# Altium PCB USBAudioAmp.PcbDoc
Units mil, origin at the board's own origin, x right, y up, seen from the top; angles counter-clockwise.
Board outline 3000 x 4000 mil, 4 copper layers (Top Layer, POWER, GROUND, Bottom Layer); 140 components, 93 nets, 395 pads, 244 vias.
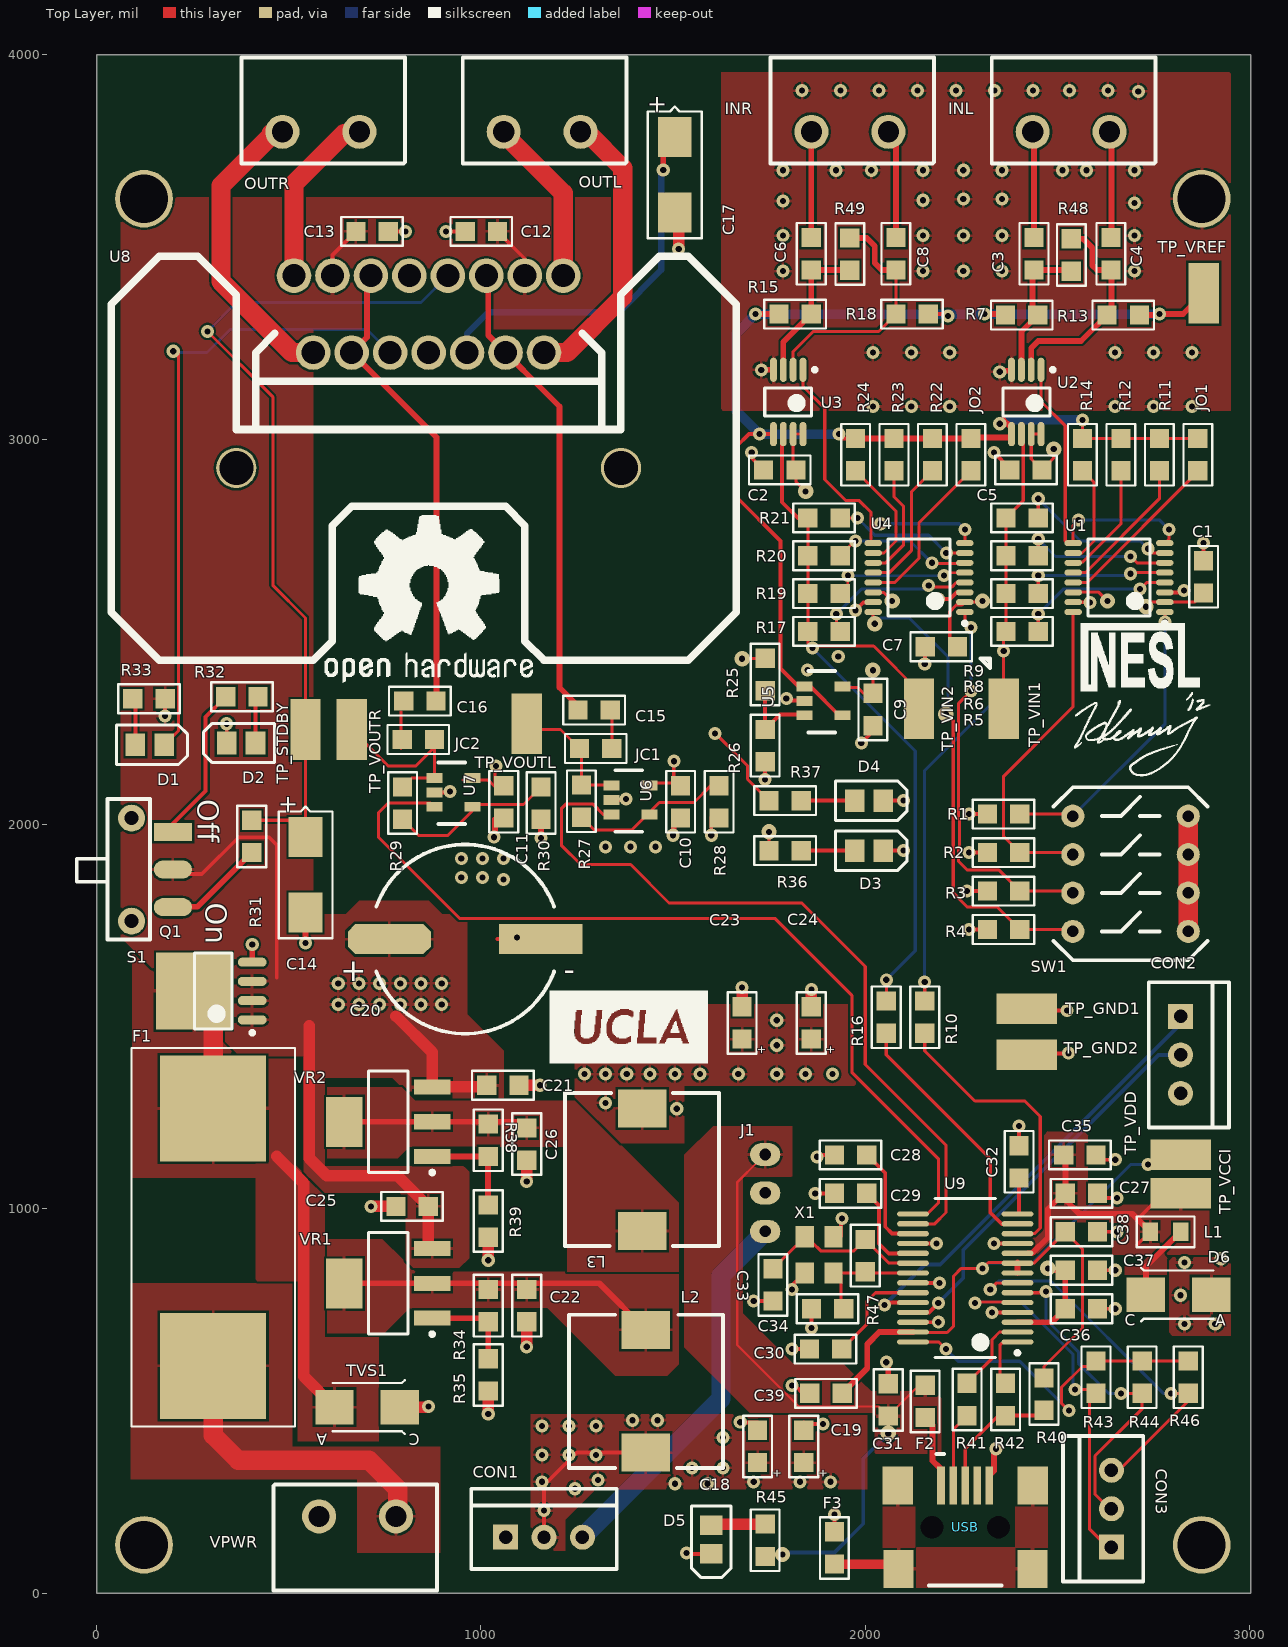
[diagram p0: Top Layer view]
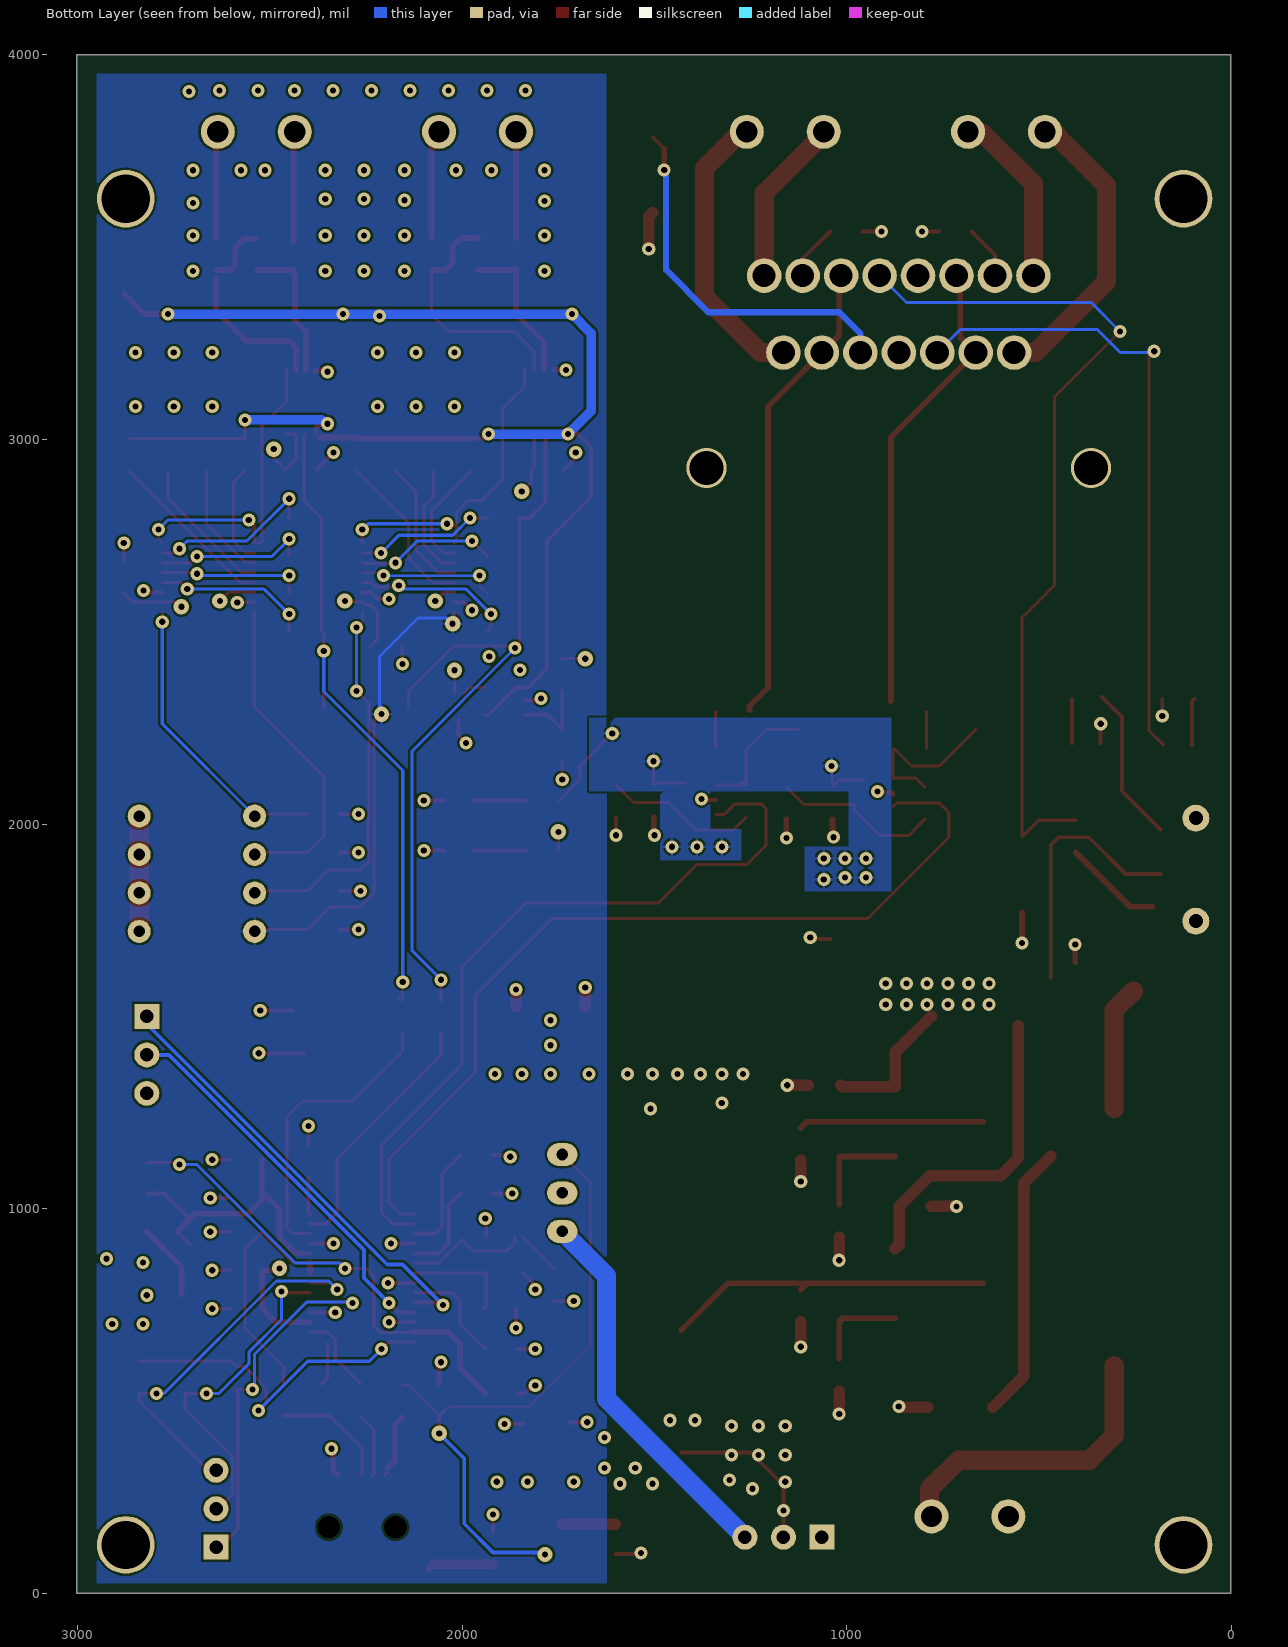
[diagram p1: Bottom Layer view, seen from below]
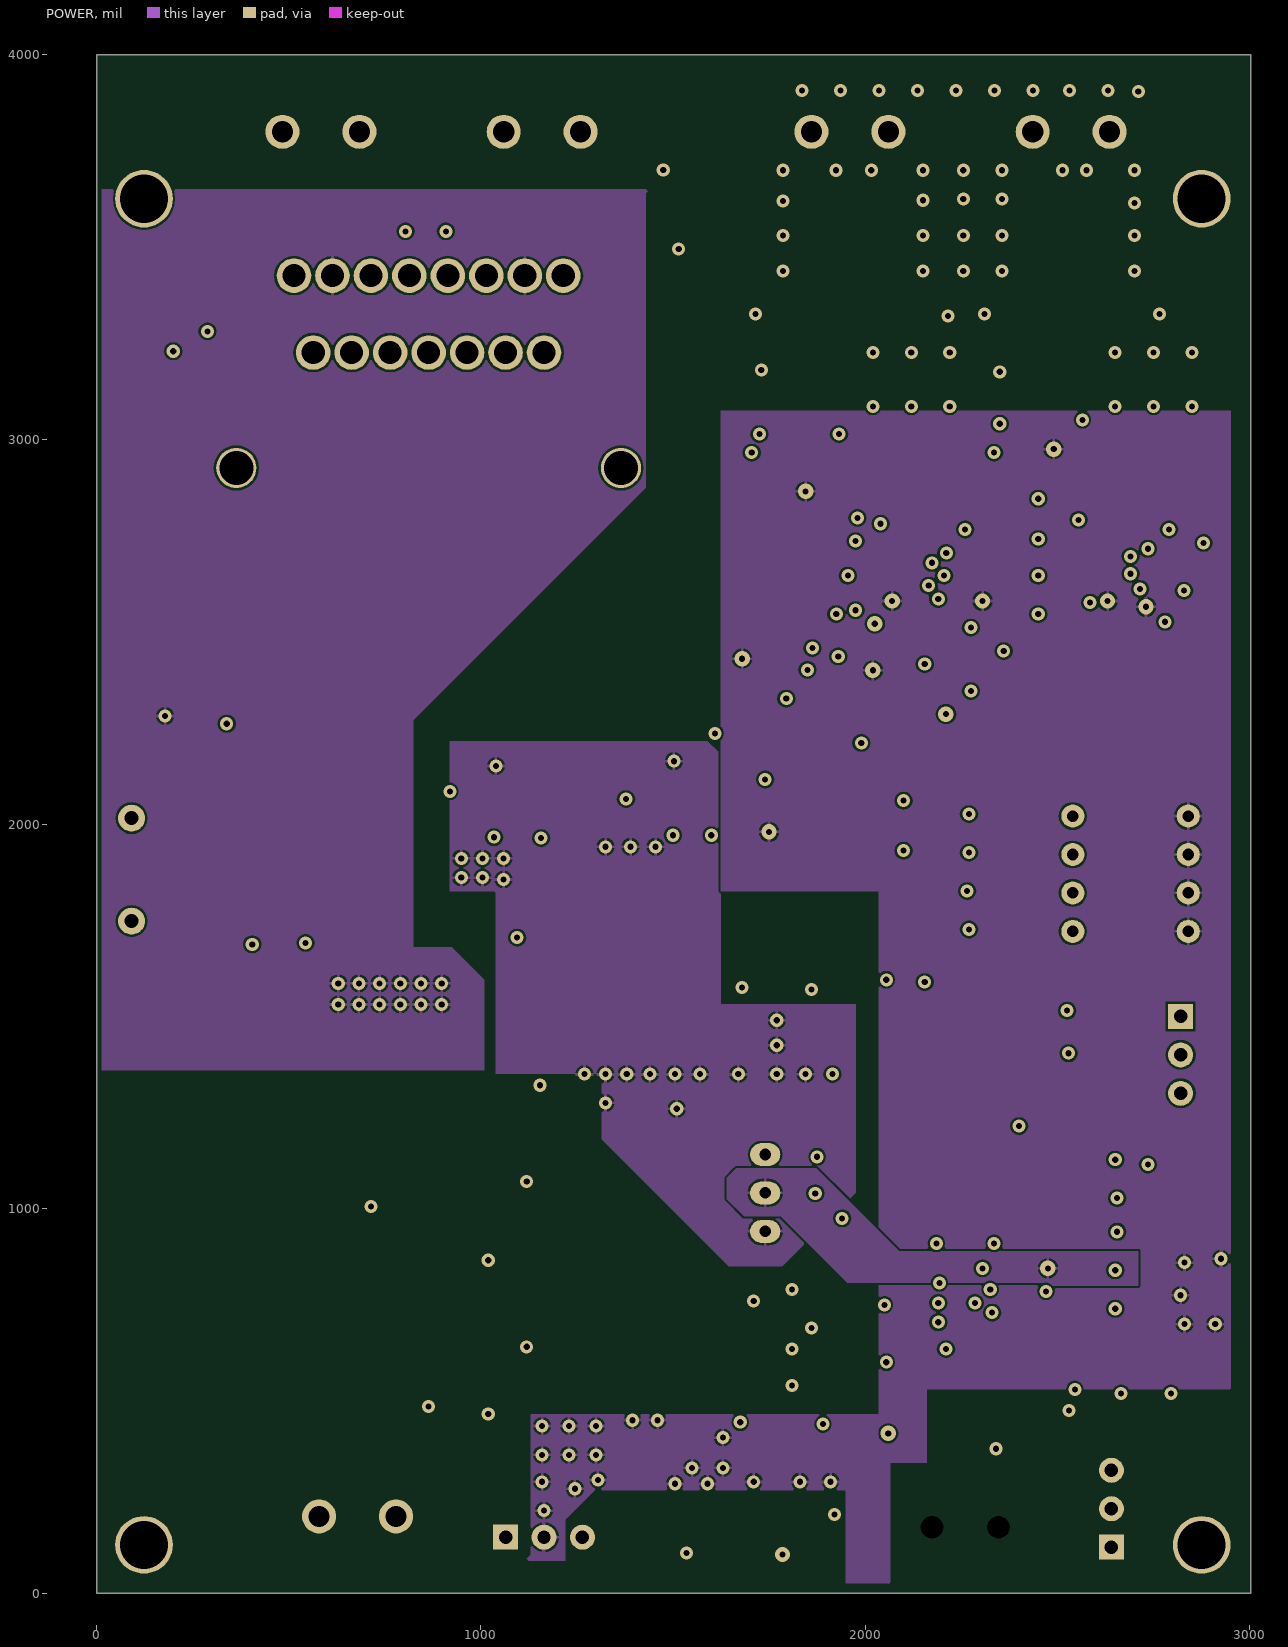
[diagram p2: POWER]
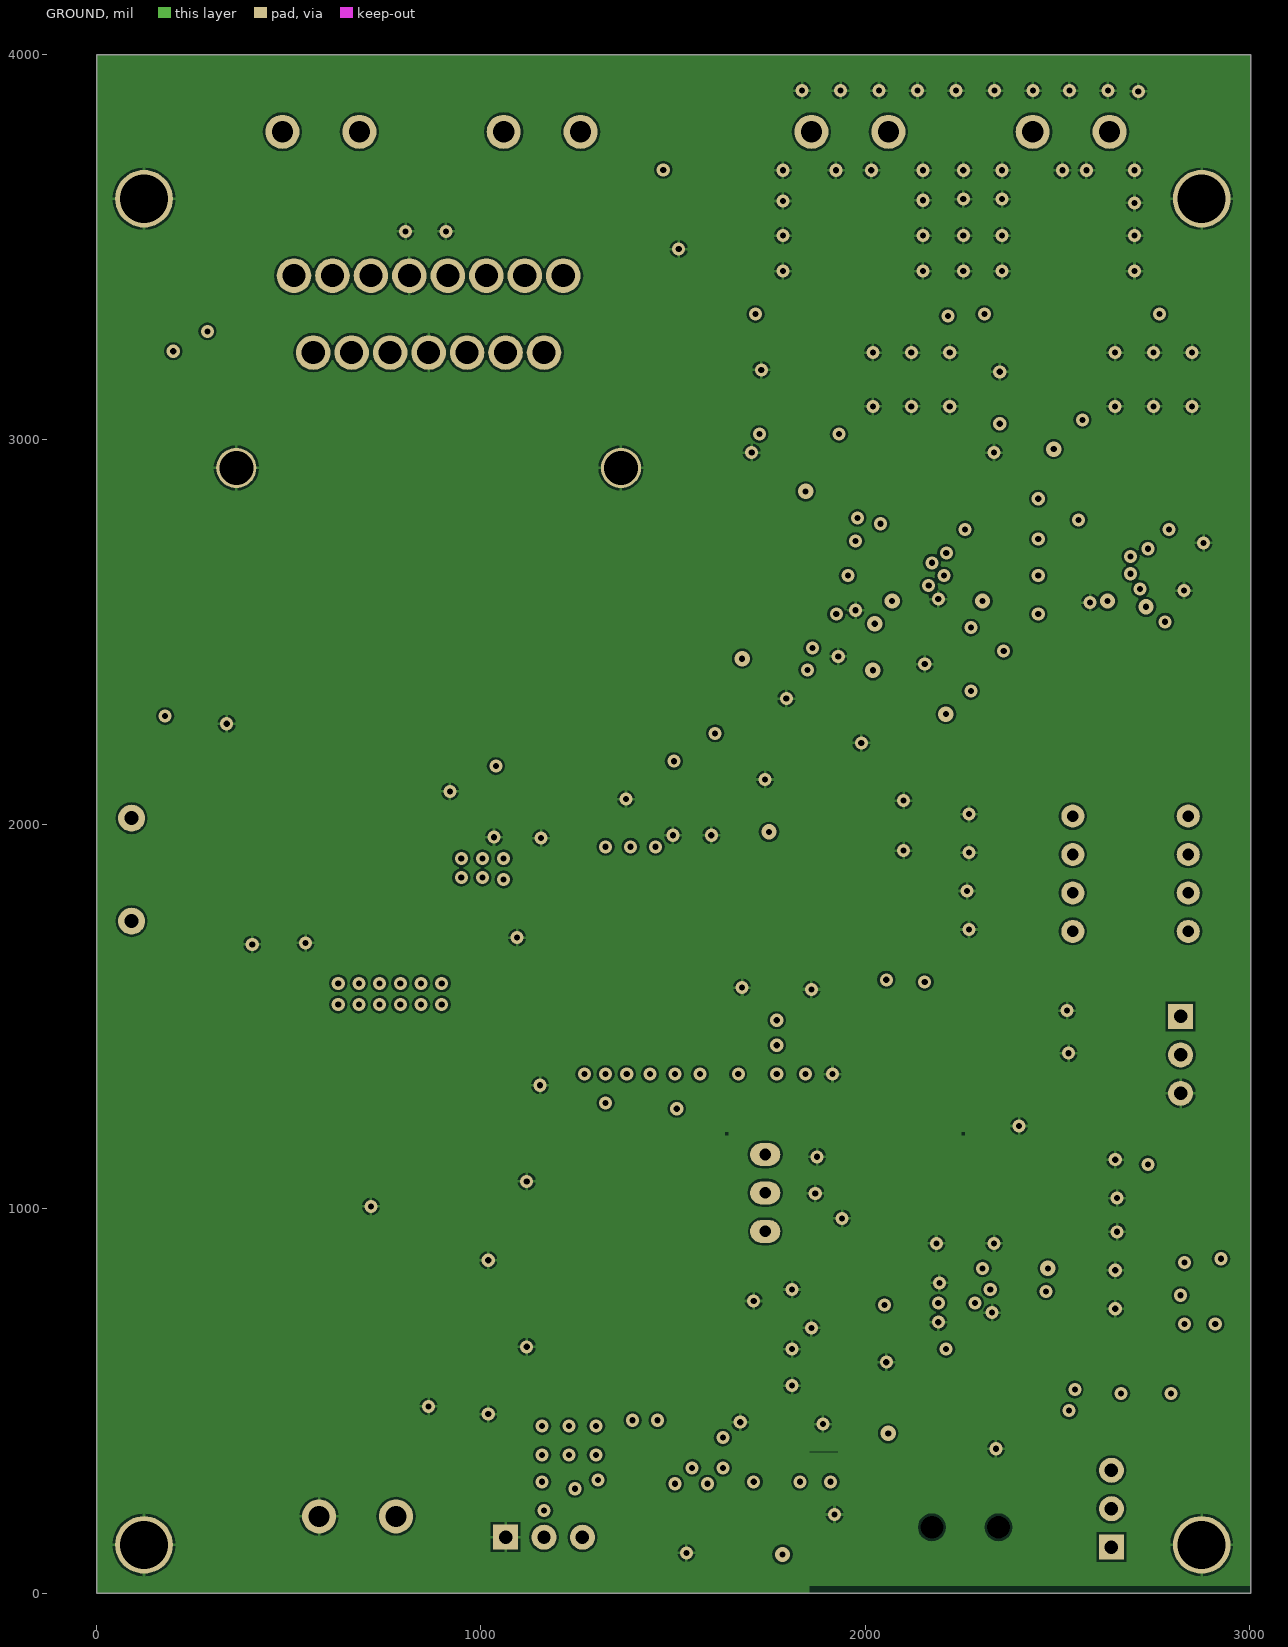
[diagram p3: GROUND]

## Layer stack, top to bottom
Top Layer: signal copper 1.4
Dielectric: core 12.6, FR-4, Dk 4.8
POWER: signal copper 1.4
Dielectric: prepreg 12.6, FR-4, Dk 4.8
GROUND: signal copper 1.4
Dielectric: core 12.6, FR-4, Dk 4.8
Bottom Layer: signal copper 1.4

## Board outline
2.11,4000.28 3002.11,4000.28 3002.11,0.28 2.11,0.28

## Design rules (kind name [scope] priority, off if disabled: settings)
Clearance "Clearance~Sunstone Circuits" [All] p1: gap=6 // Sunstone Circuits Minimum Clearance Rule (MLB~4&6 Layer Designs)
HoleSize "HoleSize~Sunstone Circuits" [All] p1: absolutevalues=TRUE maxlimit=251 minlimit=8 maxpercent=80.000 minpercent=20.000 // Sunstone Circuits Hole Size Rule (MLB~4&6 Layer Designs)
HoleSize Testpoint [All] p2: absolutevalues=TRUE maxlimit=100 minlimit=1 maxpercent=80.000 minpercent=20.000
HoleSize TestPointUsage [All] p3: absolutevalues=TRUE maxlimit=100 minlimit=1 maxpercent=80.000 minpercent=20.000
MinimumAnnularRing "MinimumAnnularRing~Sunstone Circuits" [All] p1: minimumring=7 // Sunstone Circuits Minimum Annular Ring (MLB~4&6 Layer Designs)
PlaneClearance "PlaneClearance~Sunstone Circuits" [All] p1: clearance=12 // Sunstone Circuits Power Plane Clearance Rule (MLB~4&6 Layer Designs)
PlaneConnect "PlaneConnect~Sunstone Circuits" [All] p1: planeconnectstyle=Relief reliefexpansion=10 reliefentries=4 reliefconductorwidth=8 reliefairgap=10 // Sunstone Circuits Power Plane Connect Rule (MLB~4&6 Layer Designs)
PolygonConnect "PolygonConnect~Sunstone Circuits" [All] p1: connectstyle=Relief reliefconductorwidth=8 reliefentries=4 polygonreliefangle="90 Angle" // Sunstone Circuits Polygon Connect Style (MLB~4&6 Layer Designs)
RoutingVias "RoutingVias~Sunstone Circuits" [All] p1: holewidth=16 width=30 viastyle="Through Hole" minholewidth=8 minwidth=24 maxholewidth=20 maxwidth=40 // Sunstone Circuits Routing Vias Rule (MLB~4&6 Layer Designs)
ShortCircuit "ShortCircuit~Sunstone Circuits" [All] p1: allowed=FALSE // Sunstone Circuits Short Circuit Rule~Do Not Allow (MLB~4&6 Layer Designs)
SilkscreenOverComponentPads [All] p1: minsilkscreentomaskgap=10
SolderMaskExpansion "SolderMaskExpansion~Sunstone Circuits" [All] p1: expansion=3 // Sunstone Circuits Solder Mask Expansion Rule (MLB~4&6 Layer Designs)
ViasUnderSMD "ViasUnderSMD~Sunstone Circuits" [All] p1: allowed=FALSE // Sunstone Circuits Vias Under SMD~Do Not Allow (MLB~4&6 Layer Designs)
Width "Width~Sunstone Circuits" [All] p1: maxlimit=100 minlimit=6 preferedwidth=10 // Sunstone Circuits Minimum Width Rule (MLB~4&6 Layer Designs)
23 further rules are at their usual default settings.

## Classes and differential pairs
component class AmplifierInput: BNC1 C1 C2 C3 C4 C5 C6 C7 C8 C9 JO1 JO2 R1 R2 R3 R4 R5 R6 R7 R8 R9 R10 R11 R12 R13 R14 R15 R16 R17 R18 R19 R20 R21 R22 R23 R24 R25 R26 R48 R49 SW1 TP_VIN1 TP_VIN2 TP_VREF U1 U2 U3 U4 U5
component class AmplifierOutput: C10 C11 C12 C13 C14 C15 C16 C17 D1 D2 JC1 JC2 OUTL OUTR R27 R28 R29 R30 R31 R32 R33 S1 TP_STDBY TP_VOUTL TP_VOUTR U6 U7 U8
component class PWRSUPPLY: C18 C19 C20 C21 C22 C23 C24 C25 C26 CON1 D3 D4 F1 L2 L3 Q1 Q2 R34 R35 R36 R37 R38 R39 TVS1 VPWR VR1 VR2
component class USBStereoAudioCodec: C27 C28 C29 C30 C31 C32 C33 C34 C35 C36 C37 C38 C39 CON2 CON3 D5 D6 F2 F3 J1 L1 R40 R41 R42 R43 R44 R45 R46 R47 TP_GND1 TP_GND2 TP_VCCI TP_VDD U9 USB X1

## Components (designator, comment, footprint, x,y, rotation, side; value= is the part's Value field where it differs from the comment)
C1 "CAP" SM/C_0805 2879.8,2601 r90 top
C2 "CAP" SM/C_0805 1819.8,2921 r180 top
C3 "CAP" SM/C_0805 2438.78,3441 r90 top
C4 "CAP" SM/C_0805 2638.78,3441 r90 top
C5 "CAP" SM/C_0805 2459.8,2921 r180 top
C6 "CAP" SM/C_0805 1859.8,3441 r90 top
C7 "CAP" SM/C_0805 2239.8,2461 r180 top
C8 "CAP" SM/C_0805 2079.8,3441 r90 top
C9 "CAP" SM/C_0805 2020,2340 r270 top
C10 "CAP" SM/C_0805 1520,2100 r270 top
C11 "CAP" SM/C_0805 1060,2100 r270 top
C12 "CAP" SM/C_0805 959.8,3541 r0 top
C13 "CAP" SM/C_0805 759.8,3541 r180 top
C14 "CAP_POL" SM/CT_6032_12 544.8,1966 r270 top
C15 "CAP" SM/C_0805 1337.21,2296.59 r180 top
C16 "CAP" SM/C_0805 800,2320 r0 top
C17 "CAP_POL" SM/CT_6032_12 1504.8,3786 r270 top
C18 "CAP_POL" SM/C_POL_0805 1720,340 r90 top
C19 "CAP_POL" SM/C_POL_0805 1840,340 r90 top
C20 "CAP_POL" CAP-CAN-SMD-POL-12.5mmDia 959.8,1701 r0 top
C21 "CAP" SM/C_0805 1099.8,1321 r180 top
C22 "CAP" SM/C_0805 1119.8,706 r90 top
C23 "CAP_POL" SM/C_POL_0805 1679.8,1441 r90 top
C24 "CAP_POL" SM/C_POL_0805 1859.8,1441 r90 top
C25 "CAP" SM/C_0805 779.8,1006 r0 top
C26 "CAP" SM/C_0805 1119.8,1126 r90 top
C27 "CAP" SM/C_0805 2520,1040 r0 top
C28 "CAP" SM/C_0805 1920,1140 r0 top
C29 "CAP" SM/C_0805 1920,1040 r0 top
C30 "CAP" SM/C_0805 1855,635 r0 top
C31 "CAP" SM/C_0805 2059.8,461 r90 top
C32 "CAP" SM/C_0805 2400,1080 r90 top
C33 "CAP" SM/C_0805 1760,760 r90 top
C34 "CAP" SM/C_0805 1860,740 r0 top
C35 "CAP" SM/C_0805 2600,1140 r180 top
C36 "CAP" SM/C_0805 2520,740 r0 top
C37 "CAP" SM/C_0805 2520,840 r0 top
C38 "CAP" SM/C_0805 2520,940 r0 top
C39 "CAP" SM/C_0805 1940,520 r180 top
CON1 "M03x1" M03x1 1164.8,146 r0 top
CON2 "M03x1" M03x1 2820,1400 r270 top
CON3 "M03x1" M03x1 2640,220 r90 top
D1 "LED" LED-0805 139.8,2206 r0 top
D2 "LED" LED-0805 377.4,2211 r180 top
D3 "LED" LED-0805 2009.8,1931 r0 top
D4 "LED" LED-0805 2009.8,2061 r0 top
D5 "LED" LED-0805 1600,140 r270 top
D6 "CDBA120SL-G" D0-214AC 2820,780 r0 top
F1 "0031.8221" "SCHURTER/SMD/2 PADS/0031.8221" 304.8,926 r90 top
F2 "0031.8221" SM/R_0805 2155.8,457 r90 top
F3 "Ferrite Bead" SM/R_0805 1920,160 r270 top
INL "TERM BLOCK 2POS" Conn-ScrewTerminal-2pin-Phoenix 2435.4,3800 r0 top
INR "TERM BLOCK 2POS" Conn-ScrewTerminal-2pin-Phoenix 1860.2,3800 r0 top
J1 "JMPR" M03x1-nolock 1739.8,941 r90 top
JC1 "Res" SM/R_0805 1257.21,2196.59 r0 top
JC2 "Res" SM/R_0805 880,2220 r180 top
JO1 "Res" SM/R_0805 2864.8,2918.5 r90 top
JO2 "Res" SM/R_0805 2274.8,2918.5 r90 top
L1 "Inductor" SM/L_0805 2820,940 r180 top
L2 "22uH" G_JMETRIC/TDK/SLE10145 1429.8,366 r90 top
L3 "22uH" G_JMETRIC/TDK/SLE10145 1419.8,1261 r270 top
OUTL "TERM BLOCK 2POS" Conn-ScrewTerminal-2pin-Phoenix 1060,3800 r0 top
OUTR "TERM BLOCK 2POS" Conn-ScrewTerminal-2pin-Phoenix 484.8,3800 r0 top
Q1 "SI4423DY-T1-E3" SOIC-8-Lead-Vishay-PFET 304.8,1566 r180 top
R1 "Res" SM/R_0805 2317.8,2026 r0 top
R2 "Res" SM/R_0805 2317.8,1926 r0 top
R3 "Res" SM/R_0805 2317.8,1826 r0 top
R4 "Res" SM/R_0805 2317.8,1726 r0 top
R5 "Res" SM/R_0805 2449.8,2501 r180 top
R6 "Res" SM/R_0805 2449.8,2599.33 r180 top
R7 "Res" SM/R_0805 2448.78,3323.5 r180 top
R8 "Res" SM/R_0805 2449.8,2697.67 r180 top
R9 "Res" SM/R_0805 2449.8,2796 r180 top
R10 "Res" SM/R_0805 2154.8,1456 r90 top
R11 "Res" SM/R_0805 2764.8,2918.5 r90 top
R12 "Res" SM/R_0805 2664.8,2918.5 r90 top
R13 "Res" SM/R_0805 2628.78,3323.5 r0 top
R14 "Res" SM/R_0805 2564.8,2918.5 r90 top
R15 "Res" SM/R_0805 1859.8,3326 r180 top
R16 "Res" SM/R_0805 2054.8,1456 r90 top
R17 "Res" SM/R_0805 1934.8,2501 r180 top
R18 "Res" SM/R_0805 2079.8,3326 r0 top
R19 "Res" SM/R_0805 1934.8,2599.33 r180 top
R20 "Res" SM/R_0805 1934.8,2697.67 r180 top
R21 "Res" SM/R_0805 1934.8,2796 r180 top
R22 "Res" SM/R_0805 2174.8,2918.5 r90 top
R23 "Res" SM/R_0805 2074.8,2918.5 r90 top
R24 "Res" SM/R_0805 1974.8,2918.5 r90 top
R25 "Res" SM/R_0805 1739.8,2431 r270 top
R26 "Res" SM/R_0805 1739.8,2246 r270 top
R27 "Res" SM/R_0805 1262.21,2101.59 r270 top
R28 "Res" SM/R_0805 1620,2100 r270 top
R29 "Res" SM/R_0805 797.21,2096.59 r270 top
R30 "Res" SM/R_0805 1157.21,2096.59 r270 top
R31 "Res" SM/R_0805 404.8,1926 r90 top
R32 "Res" SM/R_0805 337.4,2331 r0 top
R33 "Res" SM/R_0805 179.8,2326 r180 top
R34 "Res" SM/R_0805 1019.8,706 r90 top
R35 "Res" SM/R_0805 1019.8,526 r90 top
R36 "Res" SM/R_0805 1749.8,1931 r0 top
R37 "Res" SM/R_0805 1749.8,2061 r0 top
R38 "Res" SM/R_0805 1020,1220 r270 top
R39 "Res" SM/R_0805 1019.8,926 r90 top
R40 "Res" SM/R_0805 2464.8,560 r270 top
R41 "Res" SM/R_0805 2264.8,546 r270 top
R42 "Res" SM/R_0805 2364.8,546 r270 top
R43 "Res" SM/R_0805 2600,520 r90 top
R44 "Res" SM/R_0805 2720,520 r90 top
R45 "Res" SM/R_0805 1739.8,96 r90 top
R46 "Res" SM/R_0805 2840,520 r90 top
R47 "Res" SM/R_0805 2000,920 r270 top
R48 "Res" SM/R_0805 2535.91,3437.65 r90 top
R49 "Res" SM/R_0805 1960,3440 r90 top
S1 "SPDTSwitch" SPDTSwitch 200,1980 r270 top
SW1 "4 POS DIP SWITCH" DIPSW4PIN 2539.8,2021 r0 top
TP_GND1 "TEST_PT" TEST_PT_SMD 2420,1520 r180 top
TP_GND2 "TEST_PT" TEST_PT_SMD 2420,1400 r180 top
TP_STDBY "TEST_PT" TEST_PT_SMD 544.8,2246 r90 top
TP_VCCI "TEST_PT" TEST_PT_SMD 2820,1040 r180 top
TP_VDD "TEST_PT" TEST_PT_SMD 2820,1140 r180 top
TP_VIN1 "TEST_PT" TEST_PT_SMD 2360,2300 r90 top
TP_VIN2 "TEST_PT" TEST_PT_SMD 2140,2300 r90 top
TP_VOUTL "TEST_PT" TEST_PT_SMD 1119.8,2261 r90 top
TP_VOUTR "TEST_PT" TEST_PT_SMD 664.8,2246 r90 top
TP_VREF "TEST_PT" TEST_PT_SMD 2880,3380 r90 top
TVS1 "SMAJ20CA-TP" D0-214AC 699.8,481 r180 top
U1 "ADG1609" "TSSOP 16LEAD - Analog Devices - ADG1609" 2659.8,2641 r180 top
U2 "INA331" MSOP-8PIN-TI 2418.78,3097.63 r270 top
U3 "INA331" MSOP-8PIN-TI 1799.8,3097.63 r270 top
U4 "ADG1609" "TSSOP 16LEAD - Analog Devices - ADG1609" 2139.8,2641 r180 top
U5 "OPA335" "SOT23-5 -TI" 1842.05,2357.81 r90 top
U6 "OPA335" "SOT23-5 -TI" 1340,2100 r90 top
U7 "OPA335" "SOT23-5 -TI" 880,2120 r90 top
U8 "STA540" STA540_Multiwatt15 864.8,2926 r180 top
U9 "PCM2906" SSOP-28PIN-TI 2260,820 r180 top
USB "USB MiniB" USB-MINIB 2260,280 r0 top
VPWR "TERM BLOCK 2POS" Conn-ScrewTerminal-2pin-Phoenix 780,200 r180 top
VR1 "ADJ_VOLT_REG" LM317-SOT233-POS-ADJ-VOLT_REG 759.8,806 r180 top
VR2 "ADJ_VOLT_REG" LM317-SOT233-POS-ADJ-VOLT_REG 759.8,1226 r180 top
X1 "XTAL-FA238V" "XTAL 12MHz SMD" 1880,880 r270 top

## Footprints (in the part's own frame and the unit in brackets; to place one, negate y for a bottom-side part, rotate by r counter-clockwise, add the part's x,y. Pads: shape width x height; smd on the part's side, far side on the other; paste and mask are expansions set on the pad)
CAP-CAN-SMD-POL-12.5mmDia [mm] "Surface Mount - EEE-1EA100SR"
  oct 5.5x2 smd: 1(-5,0)
  rect 5.5x2 smd: 2(5,0)
  silkscreen extent -5.87,-6.25 5.87,6.25
Conn-ScrewTerminal-2pin-Phoenix [mm] "5.08mm"
  round 2.25 hole 1.4: 1(0,0) 2(5.08,0)
  silkscreen extent -2.7,-2.1 8.1,4.9
D0-214AC [mil]
  rect 100x90 smd: A(79.69,-3.19) C(-90.31,-3.19)
  silkscreen extent -103,-73 85,67
DIPSW4PIN [mil]
  round 60 hole 30: 1(0,0) 2(0,-100) 3(0,-200) 4(0,-300) 5(300,-300) 6(300,-200) 7(300,-100) 8(300,0)
  silkscreen extent -50,-375 350,75
G_JMETRIC/TDK/SLE10145 [mil]
  rect 98.4x126 smd: 1(0,0) 2(318.88,0)
  silkscreen extent -40,-200 358,200
LED-0805 [mm] "Chip Resistor; Body 2 x 1.2 mm (LxW typ)"
  rect 1.3x1.5 smd: 1(-0.95,0) 2(0.95,0)
  silkscreen extent -2.2,-1.3 2.5,1.3
LM317-SOT233-POS-ADJ-VOLT_REG [mm] "SOT223, 4-Leads, Body 6.7x7.3mm (max), Pitch 2.30mm, IPC Medium Density"
  rect 2.4x1 smd: 1(-2.9,2.3) 2(-2.9,0) 3(-2.9,-2.3)
  rect 2.4x3.3 smd: 2(2.9,0)
  silkscreen extent -3.03,-3.35 1.3,3.47, body extent -1.85,-3.35 1.85,3.35, height 1.8
M03x1 [mil] "3PinLockingHeader"
  rect 65x65 hole 35: 1(-100,0)
  round 65 hole 35: 2(0,0) 3(100,0)
  silkscreen extent -189,-83 189,126
M03x1-nolock [mil]
  oval 60x78.74 hole 30: 1(0,0) 2(100,0) 3(200,0)
MSOP-8PIN-TI [mm] "TI MSOP 8PIN INA331"
  oval 1.6x0.45 smd: 1(-2.125,0.975) 2(-2.125,0.325) 3(-2.125,-0.325) 4(-2.125,-0.975) 5(2.125,-0.975) 6(2.125,-0.325) 7(2.125,0.325) 8(2.125,0.975)
  silkscreen extent -2.25,-1.55 0.92,1.88, body extent -1.55,-1.55 1.55,1.55, height 1.1
"SCHURTER/SMD/2 PADS/0031.8221" [mm] "5x20 mm Fuse Holder, SMD"
  rect 7x7 smd: 1(-8.5,0) 2(8.5,0)
  silkscreen extent -12.5,-5.4 12.5,5.4
SM/C_0805 [mil]
  rect 50x50 smd: 1(0,0) 2(84,0)
  silkscreen extent -38,-38 122,38
SM/C_POL_0805 [mil]
  rect 50x50 smd: 1(0,0) 2(84,0)
  silkscreen extent -38,-38 122,38
SM/CT_6032_12 [mil]
  rect 104x88 smd: 1(0,0) 2(196,0)
  silkscreen extent -80,-70 263,70
SM/L_0805 [mil]
  rect 40x48 smd: 1(0,0) 2(79,0)
  silkscreen extent -36,-40 114,40
SM/R_0805 [mil]
  rect 50x50 smd: 1(0,0) 2(84,0)
  silkscreen extent -38,-38 122,38
SOIC-8-Lead-Vishay-PFET [mm] "NFET"
  rect 5x5.07 smd: D(1.27,0)
  oval 1.9x0.6 smd: G(-2.575,-1.905) S(-2.575,1.905) S(-2.575,-0.635) S(-2.575,0.635)
  silkscreen extent -2.7,-2.5 1.22,2.88, body extent -2,-2.5 2,2.5, height 1.75
"SOT23-5 -TI" [mm] "OPA335"
  rect 0.65x1.06 smd: 1(0,0) 2(-0.95,0) 3(-1.9,0) 4(-1.9,-2.518) 5(0,-2.518)
  silkscreen extent -3.05,-2.03 1.02,-0.25
SPDTSwitch [mil]
  round 70 hole 36: 0(-35.5,-107.5) 0(232.22,-107.5)
  rect 47x99 smd: 1(0,0)
  oval 47x99 smd: 2(98,0) 3(196,0)
  silkscreen extent -85,-250 280,-60
SSOP-28PIN-TI [mm] "TI-PCM2906"
  oval 2.1x0.35 smd: 1(-3.45,4.225) 2(-3.45,3.575) 3(-3.45,2.925) 4(-3.45,2.275) 5(-3.45,1.625) 6(-3.45,0.975) 7(-3.45,0.325) 8(-3.45,-0.325) 9(-3.45,-0.975) 10(-3.45,-1.625) 11(-3.45,-2.275) 12(-3.45,-2.925) 13(-3.45,-3.575) 14(-3.45,-4.225) 15(3.45,-4.225) 16(3.45,-3.575) 17(3.45,-2.925) 18(3.45,-2.275) 19(3.45,-1.625) 20(3.45,-0.975) 21(3.45,-0.325) 22(3.45,0.325) 23(3.45,0.975) 24(3.45,1.625) 25(3.45,2.275) 26(3.45,2.925) 27(3.45,3.575) 28(3.45,4.225)
  silkscreen extent -3.58,-5.25 2,5.25, body extent -2.8,-5.25 2.8,5.25, height 2
STA540_Multiwatt15 [mil]
  round 104.33 hole 88.58: 0(-500,0) 0(500,0)
  round 90 hole 60: 1(-350,-500) 2(-300,-300) 3(-250,-500) 4(-200,-300) 5(-150,-500) 6(-100,-300) 7(-50,-500) 8(0,-300) 9(50,-500) 10(100,-300) 11(150,-500) 12(200,-300) 13(250,-500) 14(300,-300) 15(350,-500)
  silkscreen extent -800,-550 825,500
TEST_PT_SMD [mm] "MINI_SMC_TEST_PT"
  rect 4x2 smd: 1(0,0)
"TSSOP 16LEAD - Analog Devices - ADG1609" [mm] "TSOP, 16-Leads, Body 5.1x4.5mm (max), Pitch 0.65mm, IPC Medium Density"
  oval 1.15x0.4 smd: 1(-3.025,2.275) 2(-3.025,1.625) 3(-3.025,0.975) 4(-3.025,0.325) 5(-3.025,-0.325) 6(-3.025,-0.975) 7(-3.025,-1.625) 8(-3.025,-2.275) 9(3.025,-2.275) 10(3.025,-1.625) 11(3.025,-0.975) 12(3.025,-0.325) 13(3.025,0.325) 14(3.025,0.975) 15(3.025,1.625) 16(3.025,2.275)
  silkscreen extent -3.15,-2.55 2.05,3.15, body extent -2.25,-2.55 2.25,2.55, height 1.2
USB-MINIB [mm] "SAMTEX-MUSB-05-X-B-SM-A-XX"
  rect 2x2.5 smd: 0(-4.45,0) 0(-4.4,-5.5) 0(4.44,-5.5) 0(4.45,0)
  rect 0.5x2.5 smd: 1(-1.6,0) 2(-0.8,0) 3(0,0) 4(0.8,0) 5(1.6,0)
  rect 0x0 hole 1.5: H(-2.2,-2.75) H(2.2,-2.75)
  silkscreen extent -2.4,-6.6 2.4,2.1
"XTAL 12MHz SMD" [mm] "FA-238V"
  rect 1.4x1.2 smd: 1(-1.2,-0.95) 2(1.2,-0.95) 3(1.2,0.95) 4(-1.2,0.95)

## Part data
C14 C17 C18 C19 C20 C23 C24: "CAP"
D6: library part "Schottky Diode_AC"
F1: library part 2105, "FUSEHOLDER BLACK FOR SMD 5X20MM"
F2: library part "Ferrite Bead", "Ferrite Bead"
INL INR OUTL OUTR VPWR: library part 2Pin-PhoenixTerminalBlock
J1: library part JMPR-3, "Jumper"
JC1 JC2 JO1 JO2 R1 R2 R3 R4 R5 R6 R7 R8 R9 R10 R11 R12 R13 R14 R15 R16 R17 R18 R19 R20 R21 R22 R23 R24 R25 R26 R27 R28 R29 R30 R31 R32 R33 R34 R35 R36 R37 R38 R39 R40 R41 R42 R43 R44 R45 R46 R47 R48 R49: "Resistor"
L2 L3: library part 1660, "INDUCTOR SHIELD PWR 22UH 10145"
Q1: library part 2390, "mosfet,p ch,20v,10a,8soic; transistor polarity:p channel;"
TVS1: library part 2519, "TVS 400W 12V BIDIRECT SMA"
U9: library part PCM2906C
USB: "Mini USB"

## Free pads (board coordinates)
  round 150 hole 125: 0(124.8,126) 1(2874.8,126) 2(2874.8,3626) 3(124.8,3626)

## Via types
v1: diameter 34, hole 16, Top Layer to Bottom Layer, tented both sides, 230 vias
v2: diameter 40, hole 16, Top Layer to Bottom Layer, tented both sides, 13 vias
v3: diameter 40, hole 16, Top Layer to Bottom Layer, 1 vias

## Nets (pads, with @x,y where several pads share a name; then routed paths per layer and width w, separated by ;. In a path a pad name is that pad's centre, name@x,y a point inside that pad or via, vN(x,y) a via of type N, cw(c..) or ccw(c..) an arc to the next point about the centre after c; other vN are vias at no path point)
3V7: C1.1 C2.1 C5.1 C7.1 C9.1 C18.1 C19.1 CON1.2 D6.A L2.1 R25.1 R36.1 SW1.5 SW1.6 SW1.7 SW1.8 U1.2 U1.14 U2.7 U2.8 U3.7 U3.8 U4.2 U4.14 U5.5 | length 1871.9
  Top Layer w8: v2(1680,2430) 1681,2431 R25.1 ; R36.1 v2(1749.8,1979.8) ; U3.8 U3.7 1812.6,2928.2 C2.1 1819.8,2890.2 v2(1845,2865) ; U5.5@1941.16,2355 1980.8,2355 1994.8,2341 ; C9.1 v2(2020,2400) ; U4.14 2047.39,2602.61 v2(2070,2580) ; C7.1 2219.8,2481 2219.8,2552.38 2237.42,2570 2251.87,2570 U4.2 2302.02,2577.02 v2(2305,2580) ; U2.8 U2.7 2431.58,2949.23 C5.1 2489.65,2950.84 2489.65,2974.52 v2(2490,2974.87) ; U1.14 2541.1,2603 2607,2603 v2(2630,2580) ; v3(2730,2565) 2742.02,2577.02 U1.2 2855.83,2577.02 C1.1
  Top Layer w10: CON1.2 1164.8,281 1249.8,366 L2.1
  Top Layer w50: SW1.5 SW1.6 SW1.7 SW1.8
  POWER w8: v2@2625,2580 v2(2630,2580)
  other v1: 1164.8,215 1245,271.98 1505,285 1590,285 1160,290 1710,290 1830,290 1910,290 1305,295 1550,326 1629.8,326 1160,360 1229.8,360 1300,360 1629.8,405 1160,435 1229.8,435 1300,435 1395,450 1460,450 2830,700 2910,700 2820,775 2830,860 2925,870
3V7IN: C22.2 L2.2 R34.2 VR1.2 | length 857
  Top Layer w15: VR1.2@645.63,806 873.98,806 C22.2@1103.8,806 ; C22.2 C22.2@1103.8,806 ; L2.2 1308.69,806 C22.2@1103.8,806
5V: C10.1 C11.1 C23.1 C24.1 CON1.3 J1.1 L3.1 R37.1 U6.5 U7.5 | length 1522.5
  Top Layer w8: 954.61,2115 1018.8,2115 1037.21,2096.59 1037.21,2153.4 1037.4,2153.4 v1(1039.8,2151) ; U6.5@1419.61,2107.18 1496.62,2107.18 1502.21,2101.59 1502.21,2163.6 v1(1502.4,2163.6) ; v1(1609.8,2236) 1693.8,2152 1693.8,2117 R37.1
  Bottom Layer w50: CON1.3 1624.8,506 1624.8,826 J1.1
  other v1: 1510,1260 1325,1275 1270,1350 1325,1350 1380,1350 1440,1350 1505,1350 1570,1350 1670,1350 1770,1350 1845,1350 1770,1425 1770,1490 1059.8,1856 949.8,1861 1004.8,1861 949.8,1911 1004.8,1911 1059.8,1911 1324.8,1941 1389.8,1941 1454.8,1941
5VIN: C26.2 L3.2 R38.1 VR2.2 | length 480.8
  Top Layer w15: VR2.2@645.63,1226 873.98,1226 1103.8,1226 C26.2
A0L: R1.2 SW1.1 U1.1 | length 763.2
  Top Layer w8: R1.2 SW1.1@2534.8,2026 ; U1.1 2778.9,2526.91 v1(2779.8,2526)
  Bottom Layer w8: SW1.1 2779.8,2261 v1(2779.8,2526)
A0R: R3.2 SW1.3 U4.1 | length 993.8
  Top Layer w8: U4.1 2258.9,2526.91 v1(2274.8,2511) ; v1(2274.8,2346) 2242.8,2314 2242.8,2014.82 2244.8,2012.82 2244.8,1941.18 2242.8,1939.18 2242.8,1903 2264.8,1881 2346.8,1881 R3.2 SW1.3@2534.8,1826
  Bottom Layer w8: v1(2274.8,2346) v1(2274.8,2511)
A1L: R2.2 SW1.2 U1.16 | length 850.8
  Top Layer w8: SW1.2@2534.8,1926 R2.2 2359.8,1968 2359.8,2124.8 2540.71,2305.71 U1.16
A1R: R4.2 SW1.4 U4.16 | length 1242.1
  Top Layer w8: U4.16 2020.71,2525.09 v2(2024.8,2521) ; v2(2209.8,2286) 2210.8,2287 2228.8,2269 2228.8,1821.2 2264.8,1785.2 2264.8,1785 2342.8,1785 R4.2 SW1.4@2534.8,1726
  Bottom Layer w8: v2(2024.8,2521) 2039.8,2536 2114.8,2536 2214.8,2436 2214.8,2291 v2(2209.8,2286)
GND: C1.2 C2.2 C5.2 C7.2 C9.2 C10.2 C11.2 C12.1 C13.1 C14.2 C17.2 C18.2 C19.2 C20.2 C21.1 C22.1 C23.2 C24.2 C25.1 C26.1 C27.2 C28.1 C29.1 C30.1 C31.2 C32.2 C33.1 C34.1 C35.1 C36.2 C37.2 C38.2 C39.2 CON1.1 CON2.3 D2.2 D3.2 D4.2 D5.2 F3.1 pad.0 pad.1 pad.2 pad.3 Q1.G R1.1 R2.1 R3.1 R4.1 R26.2 R28.2 R30.2 R35.1 R39.1 TP_GND1.1 TP_GND2.1 TVS1.C U1.3 U1.15 U2.4 U3.4 U4.3 U4.15 U5.2 U6.2 U7.2 U8.0 U8.8 U8.9 U9.4 U9.11 U9.18 U9.22 U9.26 USB.5 VPWR.2 X1.2 X1.4 | length 3747.3
  Top Layer w10: v1(339.8,2261) 340,2260.8 D2.2 ; C13.1 v1(804.8,3541) ; U7.2@879.21,2076 U7.2@879.8,2076.59 ; U7.2 917.6,2082.6 v1(920,2085) ; v1(909.8,3541) C12.1 ; 1043.8,1701 1099,1701 v1(1095,1705) ; U6.2 1377.6,2062.6 1378,2063 v1(1378,2065) ; v1(1535,105) 1537.4,102.6 D5.2 ; v1(1599.8,1971) R28.2@1599.8,2017 ; v1(1675,445) 1676,444 C18.2@1720,444 ; v1(1704.8,2966) 1704.8,2952 C2.2 ; v1(1710,760) C33.1 ; v1(1739.8,2116) R26.2 ; v1(1794.8,2326.41) 1794.8,2321 U5.2@1837.4,2321 ; v1(1810,540) 1818,540 1838,520 C39.2 ; v1(1810,635) 1810,630 1815,635 C30.1 ; v1(1810,790) 1810,800.16 X1.2 ; C19.2@1840,444 1844,440 v1(1890,440) ; v1(1860,690) C34.1 ; v1(1870,1040) C29.1 ; v1(1875,1135) 1880,1140 C28.1 ; F3.1 v1(1920,205) ; X1.4@1937.4,927.24 1937.4,972.4 v1(1940,975) ; v1(1974.8,2556) 1994.8,2576 2019.69,2576 U4.15 ; v1(1989.8,2211) 2009.8,2231 C9.2@2009.8,2272 ; D3.2 v1(2099.8,1931) ; D4.2 v1(2099.8,2061) ; U9.26 2189.84,704.84 v1(2190,705) ; U9.22 v1(2192.8,807.2) ; U9.18 2184.57,909.57 v1(2185,910) ; v1(2154.8,2416) 2155.8,2417 C7.2 ; v1(2190,2585) 2220,2585 2237.61,2602.61 U4.3 ; v1(2264.8,1826) R3.1 ; v1(2269.8,1726) R4.1 ; v1(2269.8,1926) R2.1 ; v1(2269.8,2026) R1.1 ; v1(2330,730) 2330.43,730.43 U9.4 ; v1(2334.8,2966) 2375.8,2925 C5.2 ; v1(2335,910) 2335.43,909.57 U9.11 ; C32.2 v1(2400,1215) ; TP_GND2.1@2410.86,1403.33 v1@2515.86,1403.33 ; TP_GND1.1@2440,1515 v1(2525,1515) ; U1.15 2583.78,2577.02 v1(2584.8,2576) ; C36.2 v1(2650,740) ; C37.2 v1(2650,840) ; C38.2 v1(2655,940) ; C35.1@2605,1127.5 v1(2650,1127.5) ; C27.2@2609,1027.5 v1(2655,1027.5) ; U1.3 2826.42,2602.61 2828.8,2605 v1(2828.8,2607.02) ; C1.2 v1(2879.8,2731)
  Top Layer w15: Q1.G v1(406.18,1687.38) ; v1(544.8,1691) C14.2 ; v1(1034.8,1966) 1037.21,1968.4 C11.2@1037.21,2012.59 ; v1(1157.21,1963.6) R30.2 ; v1(1499.8,1971) 1502.21,1973.4 C10.2@1502.21,2017.59 ; v1(1729.8,3181) 1730.1,3181.3 U3.4 ; v1(2054.8,601) 2059.8,596 C31.2 ; USB.5@2325,308.8 2335,318.8 2335,366.2 2339.8,371 v1(2339.8,376) ; v1(2349.8,3176) 2352.6,3178.8 U2.4@2380.39,3178.8
  Top Layer w30: v1(714.8,1006) C25.1 ; TVS1.C 862.99,484.19 v1(864.8,486) ; v1(1019.8,466) R35.1 ; v1(1019.8,866) R39.1 ; C21.1 v1(1154.8,1321) ; v1(1119.8,641) C22.1 ; v1(1119.8,1071) C26.1 ; C17.2 1515,3579.8 v1(1515,3495) ; C23.2 1679.8,1574.8 v1(1680,1575) ; C24.2 1859.8,1569.8 v1(1860,1570)
  other v1: 1914.8,1350 2528.78,1404.33 1929.8,2436 2019.8,3086 2119.8,3086 2219.8,3086 2649.8,3086 2749.8,3086 2849.8,3086 2019.8,3226 2119.8,3226 2219.8,3226 2649.8,3226 2749.8,3226 2849.8,3226 1786,3437.65 2150,3437.65 2255,3437.65 2356,3437.65 2700,3437.65 1786,3530 2150,3530 2255,3530 2356,3530 2700,3530 2700,3615 1786,3620 2150,3622 2255,3625 2356,3625 1786,3700 1923.8,3700 2015.8,3700 2150,3700 2255,3700 2356,3700 2512.46,3700 2575,3700 2700,3700 2710,3905 1835.8,3907 1935.8,3907 2035.8,3907 2135.8,3907 2235.8,3907 2335.8,3907 2435.8,3907 2530.8,3907 2630.8,3907
HID0: CON3.1 R43.1 U9.5 | length 1019
  Top Layer w8: v1@2290,750 2297,757 2394.85,757 U9.5 ; v1(2545,530) 2590,530 2583.5,523.5 2583.5,166.5 2630,120 CON3.1@2660,120
  Bottom Layer w8: v1@2290,750 2297,757 2405.01,757 2540,622.01 2540,535 v1(2545,530)
  other v1: 2285,755
HID1: CON3.2 R44.1 U9.6 | length 886.7
  Top Layer w8: U9.6 2466.61,781.61 v1(2470,785) ; CON3.2@2660,220 2635,220 2597.5,257.5 2597.5,357.5 2720,480 R44.1 v1(2665,520)
  Bottom Layer w8: v1(2470,785) 2470,711.81 2554,627.81 2554,598.5 2632.5,520 v1(2665,520)
HID2: CON3.3 R46.1 U9.7 | length 997.6
  Top Layer w8: v1(2325,790) 2342.2,807.2 U9.7 ; CON3.3@2660,320 2840,500 R46.1 v1(2795,520)
  Bottom Layer w8: v1(2325,790) 2347,812 2483,812 2775,520 v1(2795,520)
NetC3_1: C3.1 R7.1 R48.1 U2.3 | length 359.3
  Top Layer w15: U2.3@2405.99,3178.8 2405.99,3280.7 2435,3309.72 2435,3430 C3.1@2437.28,3430 ; C3.1 R48.1@2532.56,3441
NetC3_2: C3.2 INL.1 | length 287.5
  Top Layer w15: C3.2@2438.78,3512.5 INL.1@2438.78,3800
NetC4_1: C4.1 R13.1 R48.2 U2.2 | length 554
  Top Layer w15: U2.2@2431.58,3178.8 2431.58,3237.77 2449.8,3256 2561.28,3256 2640,3334.72 C4.1@2640,3418.5 ; R48.2 2566.75,3521.65 2590,3498.41 2590,3453.29 2602.29,3441 C4.1
NetC4_2: C4.2 INL.2 | length 254.5
  Top Layer w15: C4.2@2639.98,3522.5 INL.2@2639.98,3777
NetC6_1: C6.1 R15.1 R49.1 U3.3 | length 389.1
  Top Layer w15: U3.3 1787.01,3253.2 R15.1 C6.1 R49.1@1959,3441
NetC6_2: C6.2 INR.1 | length 274.8
  Top Layer w15: C6.2 INR.1@1859.8,3799.8
NetC8_1: C8.1 R18.1 R49.2 U3.2 | length 649.9
  Top Layer w8: U3.2 1812.6,3228.8 1864.8,3281 2034.8,3281 R18.1 C8.1
  Top Layer w15: R49.2 2004,3524 2025,3503 2025,3459.1 2043.1,3441 C8.1
NetC8_2: C8.2 INR.2 | length 283.1
  Top Layer w15: INR.2@2059.8,3799.8 2059.8,3795.2 2079.8,3775.2 C8.2
NetC14_1: C14.1 R31.2 TP_STDBY.1 U8.7 | length 2263.9
  Top Layer w8: v1(289.8,3281) 459.8,3111 459.8,2621 544.8,2536 TP_STDBY.1 C14.1 500.8,2010 R31.2
  Bottom Layer w8: v1(289.8,3281) 364.8,3356 844.8,3356 U8.7
NetC15_1: C15.1 JC1.2 | length 96
  Top Layer w8: JC1.2 C15.1@1341.21,2292.59
NetC15_2: C15.2 U8.4 U8.5 | length 1228.2
  Top Layer w8: U8.5 U8.5@1019.8,3421
  Top Layer w15: U8.5@1019.8,3421 1019.8,3271 1205,3085.8 1205,2355 1253.21,2306.79 C15.2
NetC16_1: C16.1 JC2.2 | length 96
  Top Layer w8: JC2.2@793.21,2196.59 793.21,2292.59
NetC16_2: C16.2 U8.11 U8.12 | length 1217.9
  Top Layer w8: U8.11@704.8,3416 U8.11
  Top Layer w15: U8.11@704.8,3416 704.8,3266 U8.12 885,3005.8 C16.2@885,2320
NetC17_1: C17.1 U8.6 | length 982.8
  Top Layer w8: C17.1@1474.8,3756 C17.1
  Top Layer w15: v1(1474.8,3701) C17.1@1474.8,3756
  Bottom Layer w15: v1@1469.8,3696 v1(1474.8,3701)
  Bottom Layer w16: U8.6 964.8,3276 1019.8,3331 1359.8,3331 1469.8,3441 v1@1469.8,3696
NetC28_2: C28.2 U9.17 | length 286.2
  Top Layer w10: C28.2@2004.5,1140 2052,1092.5 2052,953 2069.84,935.16 U9.17
NetC29_2: C29.2 U9.19 | length 242.8
  Top Layer w10: C29.2 2036,1008 2036,909 2061.02,883.98 U9.19
NetC30_2: C30.2 U9.23 | length 280.5
  Top Layer w8: C30.2 2005,701 2005,760 2026.61,781.61 U9.23
NetC32_1: C32.1 U9.14 | length 95.4
  Top Layer w10: U9.14 2400,990.51 C32.1
NetCON2_1: CON2.1 U9.24 | length 1169
  Top Layer w10: v1(2050,750) 2055,750 2061.02,756.02 U9.24
  Bottom Layer w10: v1(2050,750) 2155,855 2195,855 2820,1480 CON2.1
NetCON2_2: CON2.2 U9.25 | length 1015.6
  Top Layer w10: U9.25 2165.43,730.43 v1(2190,755)
  Bottom Layer w10: v1(2190,755) 2255,820 2255,892.37 2762.63,1400 CON2.2
NetD1_1: D1.1 R33.2 | length 122.7
  Top Layer w10: R33.2 102.4,2319.4 D1.1
NetD1_2: D1.2 U8.10 | length 1693.3
  Top Layer w8: D1.2 214.8,2243.6 214.8,3231 v1@209.8,3236 ; v1(200.83,3229.33) v1@200.83,3242.03
  Bottom Layer w8: v1(200.83,3229.33) 200.83,3242.03 216.86,3226 288.8,3226 348.8,3286 704.8,3286 U8.10
NetD2_1: D2.1 R32.2 | length 113.4
  Top Layer w10: D2.1 R32.2@414.8,2324.4
NetD3_1: D3.1 R36.2 | length 138.6
  Top Layer w10: R36.2 D3.1
NetD4_1: D4.1 R37.2 | length 138.6
  Top Layer w10: R37.2 D4.1
NetD5_1: D5.1 R45.2 | length 137.2
  Top Layer w30: D5.1@1602.6,180 R45.2
NetD6_C: D6.C L1.1 | length 200.6
  Top Layer w15: D6.C 2729.69,849.69 L1.1
NetF1_1: F1.1 VPWR.1 | length 763.3
  Top Layer w50: F1.1 304.8,411 369.8,346 709.8,346 784.8,271 VPWR.1@784.8,226
NetF1_2: F1.2 Q1.D TVS1.A | length 1040.3
  Top Layer w30: 469.8,1136 539.8,1066 539.8,564.5 TVS1.A
  Top Layer w50: Q1.D 305,1515.8 305,1260.84 F1.2
NetF2_1: F2.1 USB.1 | length 170.1
  Top Layer w10: USB.1@2195,325 2195,312.81 USB.1@2201.81,306
  Top Layer w15: F2.1 2175,437.8 2175,345 USB.1@2195,325
NetJO1_1: JO1.1 U1.13 | length 445.8
  Top Layer w8: U1.13 2577.01,2628.2 2864.8,2916 JO1.1
NetJO2_1: JO2.1 U4.13 | length 428.5
  Top Layer w8: U4.13 2077.01,2628.2 2139.8,2691 2139.8,2783.5 JO2.1
NetOUTL_1: OUTL.1 U8.1 | length 439.6
  Top Layer w50: OUTL.1@1062.5,3802.5 1062.5,3792.5 1214.8,3640.2 U8.1
NetOUTL_2: OUTL.2 U8.2 | length 758.3
  Top Layer w50: U8.2 1224.8,3226 1369.8,3371 1369.8,3705.2 1275,3800 OUTL.2@1250,3800
NetOUTR_1: OUTR.1 U8.14 | length 754.6
  Top Layer w50: OUTR.1@455,3795 455,3790 324.8,3659.8 324.8,3411 509.8,3226 U8.14
NetOUTR_2: OUTR.2 U8.15 | length 422.9
  Top Layer w50: U8.15 514.8,3664.8 OUTR.2@645,3795
NetR5_1: R5.1 U1.4 | length 408.1
  Top Layer w8: R5.1 v1(2449.8,2546) ; v1(2714.8,2611) 2732.01,2628.2 U1.4
  Bottom Layer w8: v1(2449.8,2546) 2514.8,2611 v1(2714.8,2611)
NetR6_1: R6.1 U1.5 | length 375
  Top Layer w8: R6.1 v1(2449.8,2646) ; v1@2692.6,2653.8 U1.5
  Bottom Layer w8: v1(2449.8,2646) 2684.8,2646 v1(2689.8,2651)
NetR8_1: R8.1 U1.6 | length 397.9
  Top Layer w8: R8.1 v1(2449.8,2741) ; v1(2689.8,2696) 2706.42,2679.39 U1.6
  Bottom Layer w8: v1(2449.8,2741) 2494.8,2696 v1(2689.8,2696)
NetR9_1: R9.1 U1.7 | length 437.5
  Top Layer w8: R9.1 v1(2449.8,2846) ; v1(2734.8,2716) 2745.83,2704.98 U1.7
  Bottom Layer w8: v1(2449.8,2846) 2559.8,2736 2714.8,2736 v1(2734.8,2716)
NetR11_1: R11.1 U1.12 | length 376.2
  Top Layer w8: U1.12 2572.6,2653.8 2764.8,2846 R11.1
NetR12_1: R12.1 U1.11 | length 303.7
  Top Layer w8: U1.11 2542.32,2681 2564.8,2681 2664.8,2781 R12.1
NetR14_1: R14.1 U1.10 | length 261.9
  Top Layer w8: U1.10 2563.78,2704.98 2594.8,2736 2594.8,2888.5 R14.1
NetR17_1: R17.1 U4.4 | length 430.2
  Top Layer w8: v1(1924.8,2546) 1924.8,2511 R17.1 ; v1(2165,2620) 2169,2616 2224.8,2616 2237.01,2628.2 U4.4
  Bottom Layer w8: v1(1924.8,2546) 1989.8,2611 2164.8,2611 2169.8,2616 2165.8,2620 v1(2165,2620)
NetR19_1: R19.1 U4.5 | length 372.3
  Top Layer w6: R19.1 1954.8,2619.33 v1(1954.8,2646) ; v1(2204.8,2646) 2212.6,2653.8 U4.5
  Bottom Layer w6: v1(1954.8,2646) v1(2204.8,2646) v1@2194.8,2646
NetR20_1: R20.1 U4.6 | length 371.7
  Top Layer w8: R20.1 1973.14,2736 v1(1974.8,2736) ; v1(2173.19,2679.39) 2174.6,2677.98 2257.49,2677.98 U4.6
  Bottom Layer w8: v1@1969.8,2731 v1(1974.8,2736) 2116.58,2736 v1(2173.19,2679.39)
NetR21_1: R21.1 U4.7 | length 361.8
  Top Layer w8: R21.1 v1(1979.8,2796) ; v1(2210.83,2704.98) U4.7
  Bottom Layer w8: v1(1979.8,2796) 2024.8,2751 2164.8,2751 v1(2210.83,2704.98)
NetR22_1: R22.1 U4.12 | length 353.1
  Top Layer w8: U4.12 2062.6,2653.8 2119.8,2711 2119.8,2863.5 R22.1
NetR23_1: R23.1 U4.11 | length 301.3
  Top Layer w8: U4.11 2053.19,2679.39 2099.8,2726 2099.8,2826 2074.8,2851 R23.1
NetR24_1: R24.1 U4.10 | length 297.9
  Top Layer w8: R24.1 2079.8,2813.5 2079.8,2736 2048.78,2704.98 U4.10
NetR25_2: R25.2 R26.1 U5.3 | length 216.7
  Top Layer w10: R25.2 R26.1 1778.8,2285 1826.99,2285 1826.19,2284.19 U5.3@1837.4,2284.19
NetR27_2: R27.2 R28.1 U6.4 | length 399.1
  Top Layer w8: R27.2 1294.8,1985 1393.8,1985 1464.8,2056 1554.8,2056 R28.1@1599.8,2101
NetR29_2: R29.2 R30.1 U7.4 | length 438.7
  Top Layer w8: R29.2 839.8,1970 913.8,1970 980,2036.2 980,2051 1111.62,2051 R30.1
NetR31_1: R31.1 S1.3 | length 258.4
  Top Layer w15: S1.3@204.8,1785 263.8,1785 R31.1
NetR32_1: R32.1 S1.1 | length 408.2
  Top Layer w10: S1.1@184.8,1986 284.8,2086 284.8,2278.4 R32.1
NetR34_1: R34.1 R35.2 VR1.1 | length 245.7
  Top Layer w15: VR1.1 1010.36,715.45 R34.1 R35.2
NetR38_2: R38.2 R39.2 VR2.1 | length 270.6
  Top Layer w15: VR2.1 1019.45,1135.45 R39.2@1019.45,1010.36
NetR40_2: R40.2 R42.2 USB.3 | length 312.5
  Top Layer w8: USB.3@2260,310.8 2260,376.2 R42.2@2345.8,462
  Top Layer w10: USB.3@2260,310.8 USB.3@2264.8,306 ; R42.2@2345.8,462 R42.2 R40.2@2464.8,462
NetR41_1: R41.1 U9.2 | length 214.8
  Top Layer w8: R41.1 2330,611.2 2330,660 2349.25,679.25 U9.2
NetR41_2: R41.2 USB.2 | length 171.8
  Top Layer w8: USB.2@2230,309.31 2230,427.2 R41.2
  Top Layer w10: USB.2@2230,309.31 USB.2@2233.31,306
NetR42_1: R42.1 U9.1 | length 112.2
  Top Layer w8: R42.1@2350,560.8 2350,645 2355,650
  Top Layer w10: R42.1@2350,560.8 R42.1
RG0: U1.8 U1.9 U2.1 | length 846
  Top Layer w8: U2.1 2457.17,3098.64 2520,3035.8 2520,2735.8 2525.24,2730.57 U1.9 2540.71,2776.91 v1(2554.8,2791) ; U1.8 2789.8,2741.47 v1(2789.8,2766)
  Bottom Layer w8: v1(2554.8,2791) 2764.8,2791 v1(2789.8,2766)
RG1: U3.1 U4.8 U4.9 | length 835.9
  Top Layer w8: U3.1 1838.19,3137.61 1894.8,3081 1894.8,2896 1949.8,2841 1984.8,2841 2014.8,2811 2014.8,2776 ; U4.9 2014.8,2736.47 2014.8,2776 ; v1(2039.8,2781) 2034.8,2776 2014.8,2776 ; U4.8 2259.8,2731.47 v1(2259.8,2766)
  Bottom Layer w8: v1(2039.8,2781) 2244.8,2781 v1(2259.8,2766)
SHIELD: F3.2 USB.0 | length 174.7
  Top Layer w15: USB.0@2074.24,76 2086.77,63.46 USB.0@2084.8,65.43
  Top Layer w25: F3.2 USB.0@2074.24,76
VCC: C12.2 C13.2 C20.1 C21.2 C25.2 Q1.S R33.1 S1.2 U8.3 U8.13 VR1.3 VR2.3 | length 2194.3
  Top Layer w10: v1(179.8,2281) R33.1 ; S1.2@184.8,1870 275,1870 371,1966 449.8,1966 469.8,1946 469.8,1601 ; U8.13 614.8,3480 C13.2 ; C12.2 1114.8,3470 U8.3
  Top Layer w30: 554.8,1476 554.8,1131 599.8,1086 783.8,1086 C25.2 863.8,906.72 VR1.3 ; 779.8,1501 873.98,1406.83 VR2.3 1011.36,1316.55 C21.2
  other v1: 629.8,1531 683.6,1531 737.4,1531 791.2,1531 845,1531 898.8,1531 629.8,1586 683.6,1586 737.4,1586 791.2,1586 845,1586 898.8,1586
VCC_AUD: C36.1 C37.1 J1.2 U9.3 | length 285.8
  Top Layer w15: U9.3 2484.84,704.84 C36.1 C37.1 2480,840 v2(2475,845)
VCCCI: C27.1 C35.2 L1.2 TP_VCCI.1 U9.10 | length 771.7
  Top Layer w10: U9.10 U9.10@2423.98,883.98 ; C27.1@2520.45,1022.95 C27.1@2525,1027.5 ; 2706,905 L1.2 ; 2715,980 2775,1040 TP_VCCI.1
  Top Layer w15: U9.10@2423.98,883.98 2433.52,883.98 2475,925.46 2475,999 C27.1@2521,1045 ; C27.1@2520.45,1022.95 2556.7,986.7 2694.3,986.7 L1.2 ; C27.1@2521,1031.5 C27.1@2521,1045 ; C35.2@2521,1127.5 C27.1@2521,1045
VDD: C38.1 C39.1 R40.1 TP_VDD.1 U9.8 U9.9 U9.27 | length 1959.8
  Top Layer w8: U9.27 2125.43,678 2213,678 2230,695 2230,825 2250,845 v1(2305,845) 2320,860 U9.9@2395.83,860 ; U9.9 2438.39,858.39 C38.1 2565,895 2565,690 2464.8,589.8 R40.1@2464.8,546 ; v1(2735,1115) 2740,1120 TP_VDD.1@2820,1120
  Top Layer w15: C39.1 2005,585 2005,647.54 2036.71,679.25 U9.27 ; U9.8 U9.9@2395.83,860
  Bottom Layer w8: 2318.39,858.39 2433.39,858.39 2690,1115 v1(2735,1115)
VINL: R10.1 U9.12 | length 781.8
  Top Layer w8: R10.1@2154.8,1446 R10.1 2154.8,1410.2 2285,1280 2415,1280 2455,1240 2455,950 2440.16,935.16 U9.12
VINL_: R5.2 R6.2 R8.2 R9.2 R10.2 TP_VIN1.1 U2.6 | length 1746.3
  Top Layer w8: v1(2154.61,1589.42) 2154.8,1589.22 R10.2 R10.2@2164.8,1550 ; TP_VIN1.1 v1(2360,2450) 2360,2495.2 R5.2 R6.2 R8.2 R9.2 2410.8,2841 2410.8,3009.15 U2.6
  Bottom Layer w8: v1(2154.61,1589.42) 2154.61,2139.61 2360,2345 v1(2360,2450)
VINR: R16.1 U9.13 | length 661.5
  Top Layer w10: R16.1 2054.8,1400.2 2325,1130 2325,990 2355,960 2395.08,960 U9.13
VINR_: R16.2 R17.2 R19.2 R20.2 R21.2 TP_VIN2.1 U3.6 | length 2022
  Top Layer w8: v1@1850.8,2469.42 R17.2 R19.2 R20.2 R21.2 ; v1(1862.56,2457.67) 1867.89,2463 2022,2463 2140,2345 TP_VIN2.1 ; R16.2 v1(2054.8,1595.2)
  Top Layer w10: U3.6 1783.8,3010.77 1783.8,2837 1824.8,2796 R21.2
  Bottom Layer w8: v1(1862.56,2457.67) 2130,2190.22 2130,1670.39 v1(2054.8,1595.2)
VOUTL: U6.3 U9.16 | length 1987.1
  Top Layer w8: U6.3 1318.74,2025.2 1291.35,2052.59 1222.3,2052.59 1210,2040.29 1210,1945 1260,1895 1390,1895 1490,1795 1835,1795 2000,1630 2000,1375 2210,1165 2210,990 2180.75,960.75 U9.16
VOUTL_PREAMP: JC1.1 R27.1 TP_VOUTL.1 U6.1 | length 333.3
  Top Layer w8: TP_VOUTL.1@1124.8,2246 1207.8,2246 JC1.1 1262.21,2191.59 R27.1 U6.1@1338.41,2101.59
  Top Layer w10: R27.1@1267.8,2107.18 R27.1@1275,2107.18
VOUTR: U7.3 U9.15 | length 2335.3
  Top Layer w8: U7.3 870.2,2055 759.71,2055 735,2030.29 735,1965 945,1755 1765,1755 1965.2,1554.8 1965.2,1354.8 2190,1130 2190,1015 2161.34,986.34 U9.15
VOUTR_PREAMP: JC2.1 R29.1 TP_VOUTR.1 U7.1 | length 436.9
  Top Layer w8: TP_VOUTR.1 759.8,2151 831.62,2151 JC2.1@877.21,2196.59 ; R29.1 820.62,2120 879.8,2120 879.8,2193.99
VPULLUP: R43.2 R44.2 R46.2 U9.28 | length 906.7
  Top Layer w8: U9.28 2191.34,653.66 v1(2210,635) ; v1(2530,475) 2510,495 2510,535 2565,590 2586,590 R43.2 R44.2 R46.2
  Bottom Layer w8: v1(2210,635) 2241.54,603.46 2401.54,603.46 v1(2530,475)
VREF: JO1.2 JO2.2 R7.2 R11.2 R12.2 R13.2 R14.2 R15.2 R18.2 R22.2 R23.2 R24.2 TP_VREF.1 U2.5 U3.5 U5.1 U5.4 | length 3996.8
  Top Layer w8: JO2.2 JO2.2@2277.3,3005 ; v1(2349.8,3041) v1@2359.8,3051 ; U2.5@2374.8,3036 2379.8,3036 2379.8,3013.97 U2.5 ; v1(2564.8,3051) R14.2 R12.2 R11.2 JO1.2
  Top Layer w10: U3.5 v1(1724.8,3013.97) 1697.78,3013.97 1664.8,2981 1664.8,2851 1779.8,2736 1779.8,2404.19 1828.99,2355 1860,2355 1932,2283 U5.4 ; v1(1931.8,3013.97) 1931.8,3009 1938.3,3002.5 R24.2 ; R18.2 v1@2214.8,3326
  Top Layer w15: v1(1714.8,3326) R15.2 ; R24.2 R23.2 R22.2 JO2.2 ; JO2.2@2277.3,3005 2369.8,3005 ; v1(2309.8,3326) 2362.28,3326 R7.2 ; v1@2359.8,3051 U2.5@2374.8,3036 ; R13.2 2762.3,3323.5 v1(2764.8,3326) 2826,3326 TP_VREF.1
  Bottom Layer w8: v1(2349.8,3041) 2354.8,3041 2364.8,3051
  Bottom Layer w25: v1(1931.8,3013.97) v1(1724.8,3013.97) 1664.8,3073.97 1664.8,3276 v1(1714.8,3326) v1(2309.8,3326) v1(2764.8,3326) ; 2364.8,3051 v1(2564.8,3051)
  other v1: 2214.8,3321
VUSB: C31.1 F2.2 J1.3 R45.1 | length 1693.5
  Top Layer w6: J1.3@1723.32,1124.51 1666.9,1068.1 1666.9,646.33 1827.23,486 2034.8,486 C31.1 2139.8,541 F2.2
  Top Layer w10: J1.3@1723.32,1124.51 J1.3 ; C31.1@2045.8,475 C31.1 v2(2059.8,416)
  Bottom Layer w10: v2(1784.8,101) 1789.8,106 1919.8,106 1994.8,181 1994.8,351 v2(2059.8,416)
XTALI: C34.2 R47.2 U9.21 X1.3 | length 282.2
  Top Layer w8: C34.2 1937.44,746.56 1937.44,832.8 U9.21
XTALO: C33.2 R47.1 U9.20 X1.1 | length 441.4
  Top Layer w8: C33.2 1842.6,926.6 X1.1 ; X1.1@1862.6,927.24 1862.6,912.4 1885.31,889.69 1969.69,889.69 R47.1 2061.61,858.39 U9.20
pads on no net: S1.0 USB.4 USB.H
copper on no net:
  other v1: 1849.8,2401

## Polygon pours and split planes (outlines as drawn)
5V on Bottom Layer "5VPour-PWR LAYER" (solid, pour order 1011): 939.8,2276 1669.8,2276 1669.8,2086 939.8,2086
5V on Bottom Layer "5VPour-PWR LAYER" (solid, pour order 1012): 1354.8,2111 1354.8,1986 1274.8,1986 1274.8,1906 1484.8,1906 1484.8,1991 1484.8,2076 1419.8,2141 1389.8,2111 1354.8,2111
5V on Bottom Layer "5VPour-PWR LAYER" (solid, pour order 1013): 999.8,2276 884.8,2276 884.8,1826 1109.8,1826 1109.8,1941 994.8,1941 994.8,2271
A1R on Bottom Layer "VBATT-Pour-PWR LAYER" (solid, remove dead copper, pour order 1017): 1624.8,3951 1624.8,26 2949.8,26 2949.8,3951
VCC on Top Layer "VCC TOP LAYER" (solid, remove dead copper, pour order 1025): 539.8,1341 769.8,1341 829.8,1281 1059.8,1281 1059.8,1411 914.8,1556 729.8,1556 729.8,1456 539.8,1456
3V7 on Top Layer "3v3 TOP LAYER" (solid, remove dead copper, pour order 1024): 1129.8,466 2004.8,466 2004.8,271 1299.8,271 1219.8,191 1219.8,111 1134.8,111 1129.8,116 1129.8,466
3V7IN on Top Layer "3V3INTOP LAYER" (solid, remove dead copper, pour order 1022): 599.8,921 744.8,921 809.8,856 829.8,836 1224.8,836 1514.8,836 1514.8,646 1514.8,596 1484.8,566 1349.8,566 1244.8,671 1174.8,741 1134.8,741 814.8,741 749.8,676 599.8,676 599.8,921
5VIN on Top Layer "5VinTOP LAYER" (solid, remove dead copper, pour order 1021): 589.8,1316 794.8,1316 824.8,1286 829.8,1281 1249.8,1281 1394.8,1136 1514.8,1016 1514.8,836 1224.8,836 1224.8,1161 814.8,1161 784.8,1131 589.8,1131 589.8,1316
NetF1_2 on Top Layer "VCC TOP LAYER" (solid, remove dead copper, pour order 1019): 514.8,1081 94.8,1081 94.8,1696 364.8,1696 369.8,1691 369.8,1441 514.8,1441 514.8,1081
VCC on Top Layer "VCC TOP LAYER" (solid, remove dead copper, pour order 1018): 369.8,1611 564.8,1611 629.8,1676 629.8,1746 649.8,1766 684.8,1801 859.8,1801 864.8,1801 924.8,1741 924.8,1551 924.8,1546 834.8,1456 819.8,1441 369.8,1441 369.8,1611
VCC on Top Layer "5VPour-PWR LAYER" (solid, pour order 1008): 539.8,1396 539.8,1096 594.8,1041 789.8,1041 804.8,1026 804.8,891 804.8,866 824.8,846 939.8,846 944.8,846 969.8,871 969.8,1096 959.8,1106 954.8,1111 594.8,1111 594.8,1396 539.8,1396
NetF1_2 on Top Layer "5VPour-PWR LAYER" (solid, pour order 1010): 414.8,1081 414.8,816 419.8,811 524.8,811 524.8,396 734.8,396 734.8,666 594.8,666 594.8,1036.85 514.8,1116.85 510.65,1121 414.8,1121 414.8,1081
NetF1_1 on Top Layer "VCC TOP LAYER" (solid, remove dead copper, pour order 1020): 894.8,106 894.8,381 509.8,381 509.8,806 89.8,806 89.8,296 679.8,296 679.8,106
GND on Top Layer "Top Layer-GND" (solid, pour order 1009): 1624.8,3075 1625,3075.2 1625,3955 2945.8,3955 2949.8,3951 2949.8,3075 1630,3075 1620,3085 1625,3085
5V on Top Layer "5V-TOP" (solid, pour order 1002): 1625,1530 1626,1531 1974.8,1531 1974.8,1323.69 1973.78,1322.67 1971.11,1320 1655,1320 1530,1320 1530,1170 1365,1170 1245,1290 1245,1531 1624,1531 1625,1530
NetD6_C on Top Layer "NETD6-TOP" (solid, pour order 1006): 2885,965 2799,965 2794,970 2794,933.47 2793.47,933.47 2710,850 2675,850 2675,725 2790,725.81 2790,862.48 2827.52,900 2890,900 2890,960
VCCCI on Top Layer "VCCI-TOP" (solid, pour order 1004): 2430,895 2430,925 2465,960 2460,965 2460,1186 2475,1201 2476,1200 2570,1200 2580,1190 2578.97,1188.97 2578.97,1026.03 2595,1010 2895,1010 2895,880 2644.5,880 2642,877.5 2642,965 2490,965 2490,912.99 2442.01,865 2315,865 2300,880 2300,895
VCC on Top Layer "VCC-Pour-PWR LAYER" (solid, remove dead copper, pour order 1016): 1429.8,3630 64.8,3630 64.8,1706 374.8,1396 964.8,1396 964.8,1766 564.8,1766 564.8,3286 1429.8,3286
VUSB on Top Layer "VUSBTOP" (solid, pour order 1007): 1810,1080 1810,1215 1605,1215 1530,1140 1530,640 1700,470 2022.3,470 2025,457.3 2025,365 2027.32,362.68 2197.68,362.68 2200,365 2197.3,367.7 2197.3,507.5 2179.77,525.03 2179.74,525 2015,525 1942.5,597.5 1812.5,597.5 1681.56,728.44 1681.56,1082.76 1807.24,1082.76
3V7 on Top Layer "3V-TOP" (solid, pour order 1005): 2790,865 2830,900 2949.8,900 2949.8,670 2798.42,670 2790,678.57
SHIELD on Top Layer "SHIELD-TOP" (solid, pour order 1003): 2045,330 2130,330 2130,120 2390,120 2390,330 2475,330 2475,15 2045,15
3V7 on POWER "3V3-PWR" (solid, pour order 1001): 1129.8,466 2034.8,466 2034.8,265.2 2035,265 2031.67,268.33 1838.97,268.33 1297.14,268.33 1219.8,191 1220,190.8 1220,85 1125,85 1120,90 1129.8,99.8 1129.8,466
5V on POWER "5VPour-PWR LAYER" (solid, remove dead copper, pour order 1015): 919.8,2216 1589.8,2216 1704.8,2101 1809.8,2101 1809.8,1986 1624.8,1986 1624.8,1481 1754.8,1351 1039.8,1351 1039.8,1821 1034.8,1826 919.8,1826
5V on POWER "5v TOP LAYER" (solid, remove dead copper, pour order 1023): 1314.8,1531 1314.8,1181 1644.8,851 1784.8,851 1974.8,1041 1974.8,1531
3V7 on POWER "3V3-Pour-PWR LAYER" (solid, remove dead copper, pour order 1014): 1624.8,3075 2949.8,3075 2949.8,529.97 2285,530 2160,530 2160,340 2065,340 2065,25 1949.8,26 1949.8,466 2034.8,466 2034.8,1826 1624.8,1826
VCC_AUD on POWER "VCCAUD-TOP" (solid, pour order 1000): 2685,890 2710,890 2710,800 2478.45,800 2470,808.45 2468.75,807.2 2192.8,807.2 1952.8,807.2 1780,980 1690,980 1685,980 1640,1025 1640,1080 1660,1100 1665,1105 1835,1105 1873,1105 2020,958 2088,890 2685,890
VCC on POWER "VCC-TOP" (solid, pour order 1000): 1010,1358.5 1008.5,1360 15,1360 15,3650 1170,3650 1429.8,3650 1434.8,3645 1429.8,3640 1429.8,3290.62 1429.8,2874.8 885,2330 825,2270 825,1680 925,1680 1010,1595 1010,1358.5
GND on GROUND "DGND@GND" (solid, pour order 1002): 1605,1190 2260,1190 2260,892.37 2597.5,892.37 2597.5,20 1825,20 1825,365 1930,365 1930,470 1605,470
GND on GROUND "AGND-DGND@GND" (solid, pour order 1001): 1652.44,1570.85 1645,1567.39 1645,922.98 2232.2,922.98 2249.37,915 2249.37,1570.85 1652.44,1570.85
GND on GROUND "AGND@GND" (solid, pour order 1000): 2.11,4000.28 3002.11,4000.28 3002.11,20 2567.37,20 2564.81,880 2260,880 2260,1200 1635,1200 1629.8,485 1930,486 1930,370 1855,370 1855,0.28 2.11,0.28

## Other copper
Bottom Layer:
  pour cut-out: 1625,3980 1625,2253.84 1624.8,2253.64 1598.44,2280 1530,2280 1530,3980

## Silkscreen, mask and mechanical layers (free items; w line width, h text height)
Top Overlay:
  drawing of 4033 lines, arcs and shapes, not listed
Mechanical 2:
  drawing of 1190 lines, arcs and shapes, not listed
  text "2" at -1376.38,4665 h120
  text "1" at 4132.93,4665 h120
  text "B" at -3846.62,2820 h120
  text "B" at 6593.38,2820 h120
  text "A" at -3861.04,-1430 h120
  text "A" at 6578.96,-1430 h120
  text "2" at -1376.38,-3275 h120
  text "1" at 4132.93,-3275 h120
Mechanical 4:
  lines w5: -1220,-2865 1530,-2865 6530,-2865 ; -1220,-2490 1530,-2490 ; -1220,-2115 1530,-2115 ; -1220,-1740 1530,-1740 ; -1220,-1365 1530,-1365 ; -1220,-990 1530,-990 ; 530,-3115 530,-615 ; 1530,-3115 1530,-615 ; 1530,-2365 6530,-2365 ; 1530,-1235 6530,-1235 ; 2030,-2865 2030,-2365 ; 2650.01,-3115 2650.01,-2865 ; 3030,-2865 3030,-2365 ; 4530,-3115 4530,-2865 ; 6030,-2865 6030,-2365 ; -1220,-3115 6530,-3115 6530,-615 -1220,-615 -1220,-3115
  text "DRAWN" at -1190,-745 h100
  text "H. Herman" at -900,-905 h200
  text "NESL UCLA" at 1790,-1050 h400
  text "CHECKED" at -1190,-1120 h100
  text "H. Herman" at -890,-1290 h200
  text "TITLE" at 1560,-1365 h100
  text "QA" at -1190,-1495 h100
  text "MFG" at -1190,-1870 h100
  text "USB Audio Amplifier" at 2715,-1910 h300
  text "APPROVED" at -1190,-2245 h100
  text "H. Herman" at -950,-2405 h200
  text "SIZE" at 1639,-2495 h100
  text "DWG NO" at 3060,-2495 h100
  text "REV" at 6157.43,-2495 h100
  text "UWAUDIO001" at 3930,-2640 h200
  text "B" at 6220,-2715 h200
  text "A" at 1720,-2725 h200
  text "SCALE" at 1560,-2995 h100
  text "1:1" at 2200,-3040 h200
Mechanical 5:
  circle w5: c2877.11,3625.28 r62.5
  circle w5: c2877.11,125.28 r62.5
  circle w5: c127.11,125.28 r62.5
  circle w5: c127.11,3625.28 r62.5
Mechanical 7:
  the board outline again, w5

## Dimensions
1378.9,3992.91 to 1753.9,3992.91 on Mechanical 4
2179.1,3992.91 to 2329.1,3992.91 on Mechanical 4
2.11,4000.28 to 3002.11,4000.28 on Mechanical 4
2.11,4000.28 to 2.11,0.28 on Mechanical 4
2874.8,126 to 124.8,126 on Mechanical 4
2874.8,3626 to 2874.8,126 on Mechanical 4
803.7,3992.91 to 953.7,3992.91 on Mechanical 4

## Text inside footprints (layer, text, board x,y; h text height)
C14: Top Overlay "+" at 479.8,2076 h45 r270
C17: Top Overlay "+" at 1439.8,3896 h45 r270
C18: Top Overlay "+" at 1780,300 h20 r90
C19: Top Overlay "+" at 1900,300 h20 r90
C20: Top Overlay "-" at 1215.71,1592.73 h60; Top Overlay "+" at 703.9,1641.94 h60 r180
C23: Top Overlay "+" at 1739.8,1401 h20 r90
C24: Top Overlay "+" at 1919.8,1401 h20 r90
D6: Top Overlay "C" at 2675,685 h50; Top Overlay "A" at 2910,685 h50
S1: Top Overlay "Off" at 265,2065 h55.12 r270; Top Overlay "On" at 285,1795 h55.12 r270
TVS1: Top Overlay "C" at 841.54,425.88 h50 r180; Top Overlay "A" at 601.38,425.88 h50 r180